# EAGLE board arduino_uno_pcb _with_lcd (EAGLE 6.1)
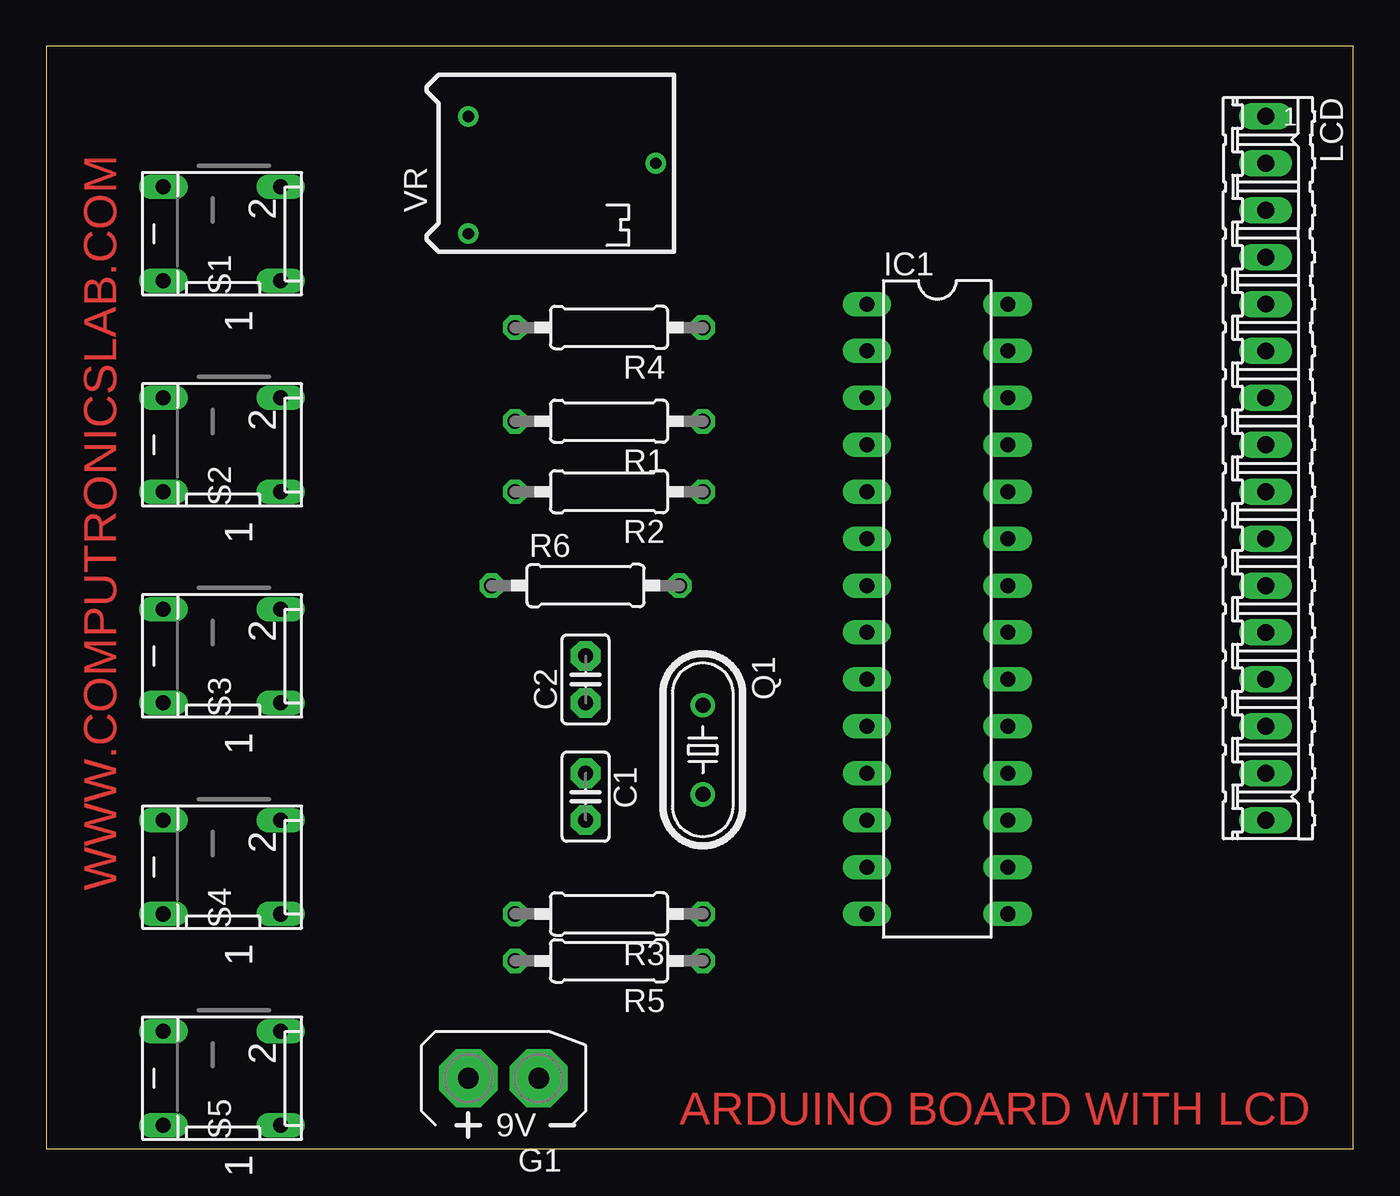
[diagram p0: board, top side]
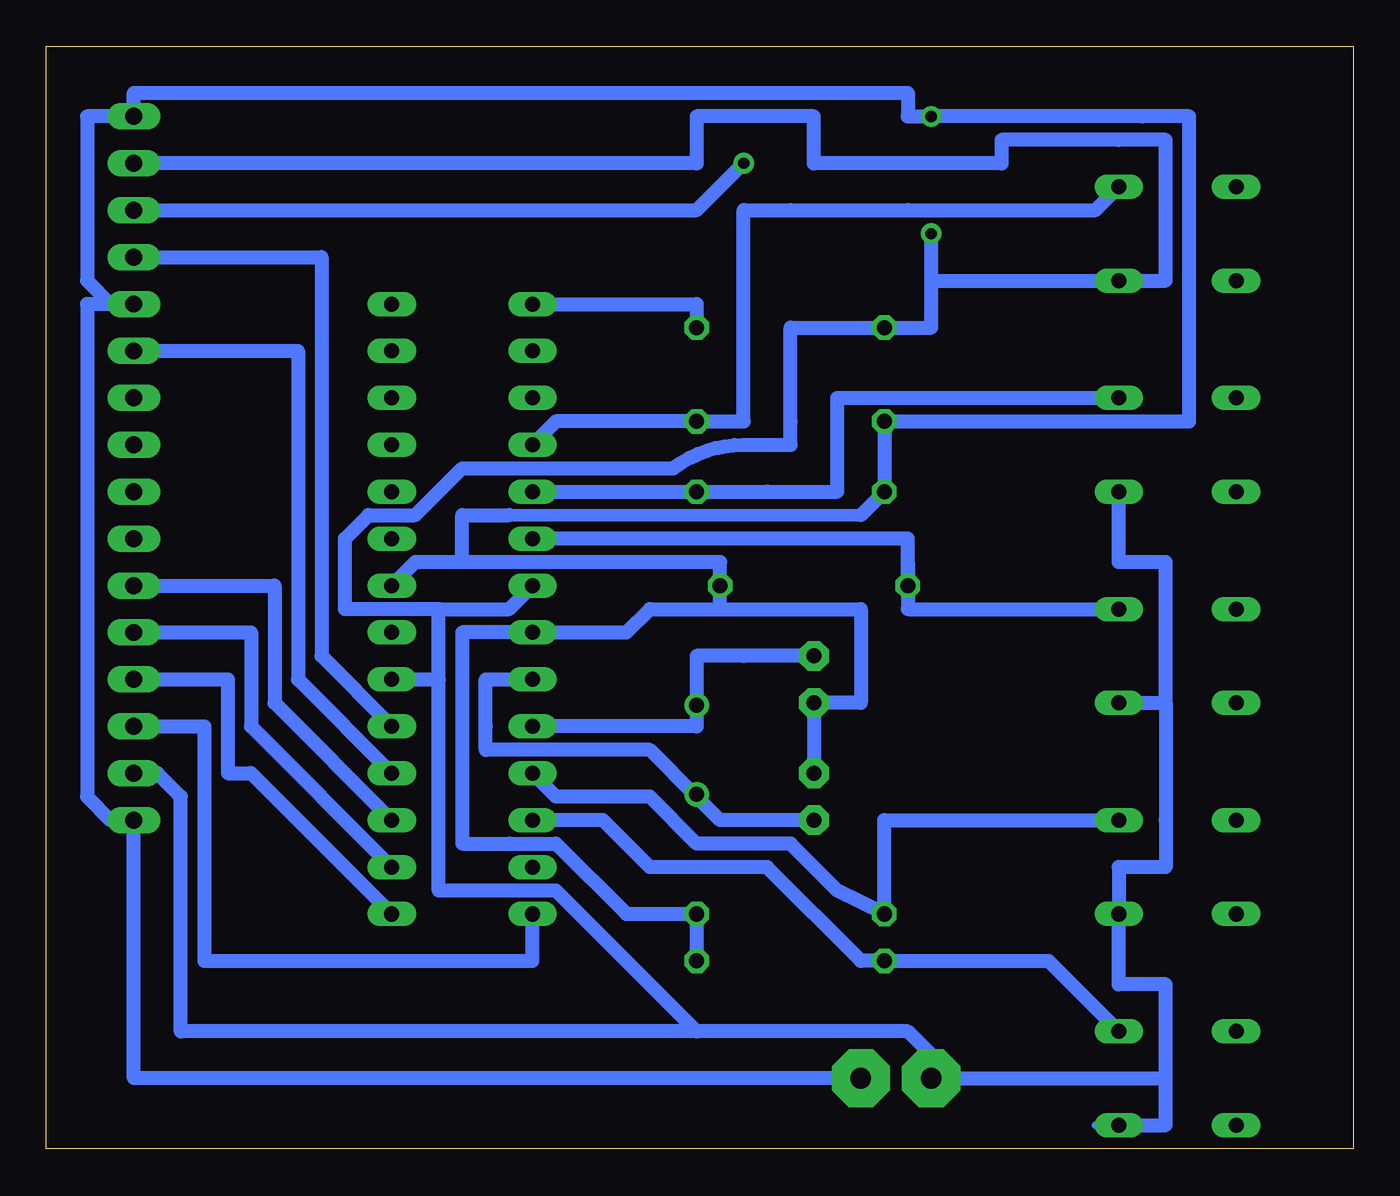
[diagram p1: board, bottom side, seen from below]

Size 70.79 x 59.68 mm. Coordinates in mm from the lower left corner, seen from the top.
Outline: 0,0 70.79,0 70.79,59.68 0,59.68 0,0
Copper layers (1*16): Top 0.04mm / dielectric 1.5mm / Bottom 0.04mm
Design rules: minimum track width 30mil, minimum drill 35mil, track to track 8mil, track to pad 8mil, pad to pad 8mil, via to via 8mil, smd to smd 8mil, copper to edge 50mil, drill to drill 8mil, minimum pad ring 10mil, minimum via ring 8mil, stop-mask expansion 4mil, vias tented up to drill 0mil, thermal gap 10mil

## Footprints (pad centres in the part's own frame; a part is rotated, then mirrored left to right if it is on the bottom)
C2.5-2 = drill 0.813 pad 1.6 octagon: 1 -1.27,0; 2 1.27,0
AB9V = drill 1.118 pad 3.15 octagon: + 0,2.54; - 0,-1.27
DIL28-3 = drill 0.813 long: 1 -16.51,-3.81; 2 -13.97,-3.81; 3 -11.43,-3.81; 4 -8.89,-3.81; 5 -6.35,-3.81; 6 -3.81,-3.81; 7 -1.27,-3.81; 8 1.27,-3.81; 9 3.81,-3.81; 10 6.35,-3.81; 11 8.89,-3.81; 12 11.43,-3.81; 13 13.97,-3.81; 14 16.51,-3.81; 15 16.51,3.81; 16 13.97,3.81; 17 11.43,3.81; 18 8.89,3.81; 19 6.35,3.81; 20 3.81,3.81; 21 1.27,3.81; 22 -1.27,3.81; 23 -3.81,3.81; 24 -6.35,3.81; 25 -8.89,3.81; 26 -11.43,3.81; 27 -13.97,3.81; 28 -16.51,3.81
16P = drill 0.914 long: 1 -19.05,0; 2 -16.51,0; 3 -13.97,0; 4 -11.43,0; 5 -8.89,0; 6 -6.35,0; 7 -3.81,0; 8 -1.27,0; 9 1.27,0; 10 3.81,0; 11 6.35,0; 12 8.89,0; 13 11.43,0; 14 13.97,0; 15 16.51,0; 16 19.05,0
HC49/S = drill 0.813: 1 -2.413,0; 2 2.413,0
0207/10 = drill 0.813 octagon: 1 -5.08,0; 2 5.08,0
DP-02 = drill 0.813 long: 1 -2.54,-2.54; 2 2.54,-2.54; 3 2.54,3.81; 4 -2.54,3.81
RTRIM64P = drill 0.61: 1 -2.54,-3.81; 2 7.62,0; 3 -2.54,2.54

## Placement (x,y rotation side)
C1  22pf  [C2.5-2]  29.21,19.05 270 top
C2  22pf  [C2.5-2]  29.21,25.4 90 top
G1  AB9V  [AB9V]  25.4,3.81 90 top
IC1  ATMEGA328  [DIL28-3]  48.26,29.21 270 top
LCD  [16P]  66.04,36.83 270 top
Q1  16MHZ  [HC49/S]  35.56,21.59 270 top
R1  10K  [0207/10]  30.48,39.37 180 top
R2  10K  [0207/10]  30.48,35.56 180 top
R3  10K  [0207/10]  30.48,12.7 180 top
R4  10K  [0207/10]  30.48,44.45 180 top
R5  10K  [0207/10]  30.48,10.16 180 top
R6  10K  [0207/10]  29.21,30.48 0 top
S1  [DP-02]  10.16,49.53 90 top
S2  [DP-02]  10.16,38.1 90 top
S3  [DP-02]  10.16,26.67 90 top
S4  [DP-02]  10.16,15.24 90 top
S5  [DP-02]  10.16,3.81 90 top
VR  100k  [RTRIM64P]  25.4,53.34 0 top

## Library data of the parts
C1 C2 = capacitor-wima
G1 = battery
IC1 = quantum-research-group; OC_FARNELL: unknown; OC_NEWARK: unknown
LCD = con-amp-quick; OC_FARNELL: unknown; OC_NEWARK: unknown
Q1 = crystal; OC_FARNELL: 1667008; OC_NEWARK: unknown
R1-R6 = rcl
S1-S5 = switch-dil; MPN: MCDP02; OC_FARNELL: 1255233; OC_NEWARK: 26M1095
VR = resistor

## Nets
N$1: C1.2 IC1.9 Q1.2
N$2: C2.2 IC1.10 Q1.1
N$3: G1.+ IC1.7 IC1.20 LCD.2 LCD.15 R4.2 S1.1 S2.1 S3.1 S4.1 S5.1 VR.1
N$4: IC1.11 R3.2 S4.2
N$5: IC1.4 R1.1 S1.2
N$6: C1.1 C2.1 G1.- IC1.8 IC1.22 LCD.1 LCD.5 LCD.16 R1.2 R2.2 R3.1 R5.1 R6.2 VR.3
N$7: IC1.5 R2.1 S2.2
N$8: IC1.6 R6.1 S3.2
N$9: IC1.12 R5.2 S5.2
N$22: LCD.3 VR.2
N$23: IC1.19 LCD.4
N$24: IC1.18 LCD.6
N$25: IC1.17 LCD.11
N$26: IC1.16 LCD.12
N$27: IC1.15 LCD.13
N$29: IC1.14 LCD.14
N$31: IC1.1 R4.1

## Tracks (layer width: path | path; a pad name or v marks a point on that pad's centre or on a via)
N$1
  Bottom 0.762: 35.56,19.05 34.29,17.78 C1.2 | 35.56,19.05 Q1.2 35.56,19.05 | IC1.9 46.99,25.4 46.99,22.86 46.99,21.59 38.1,21.59 35.56,19.05
N$2
  Bottom 0.762: 35.56,24.13 35.56,26.67 33.02,26.67 C2.2 | 35.56,24.13 Q1.1 35.56,24.13 | IC1.10 35.56,22.86 35.56,24.13
N$3
  Bottom 0.406: 10.16,5.08 10.16,3.81 10.16,1.27 S5.1 13.97,1.27
  Bottom 0.762: 22.86,46.99 22.86,44.45 R4.2 30.48,44.45 30.48,39.37 30.48,38.1 33.02,38.1 arc-37 36.83,36.83 39.37,36.83 48.26,36.83 50.8,34.29 53.34,34.29 54.61,33.02 54.61,29.21 49.53,29.21 | 22.86,46.99 VR.1 | 22.86,46.99 S1.1 10.16,46.99 10.16,52.07 10.16,54.61 12.7,54.61 19.05,54.61 19.05,53.34 29.21,53.34 29.21,55.88 35.56,55.88 35.56,54.61 35.56,53.34 LCD.2 | 10.16,24.13 10.16,17.78 10.16,15.24 12.7,15.24 S4.1 12.7,8.89 10.16,8.89 10.16,6.35 10.16,5.08 10.16,3.81 | S3.1 10.16,24.13 | S2.1 12.7,31.75 10.16,31.75 10.16,29.21 10.16,24.13 | IC1.7 45.72,29.21 49.53,29.21 | 49.53,25.4 49.53,29.21 | IC1.20 49.53,25.4 | LCD.15 64.77,20.32 63.5,19.05 63.5,6.35 35.56,6.35 | 35.56,6.35 24.13,6.35 22.86,5.08 | G1.+ 22.86,5.08 | 49.53,25.4 49.53,13.97 43.18,13.97 35.56,6.35 | 22.86,5.08 G1.+ | G1.+ 10.16,3.81 | S5.1 10.16,1.27 10.16,3.81
N$4
  Bottom 0.762: S4.2 25.4,17.78 R3.2 27.94,13.97 30.48,16.51 35.56,16.51 38.1,19.05 43.18,19.05 IC1.11
N$5
  Bottom 0.762: IC1.4 43.18,39.37 R1.1 33.02,39.37 33.02,50.8 30.48,50.8 24.13,50.8 13.97,50.8 S1.2
N$6
  Bottom 0.686: 45.72,34.29 26.67,34.29
  Bottom 0.762: G1.- 66.04,3.81 LCD.16 67.31,17.78 68.58,19.05 68.58,45.72 67.31,45.72 | 67.31,45.72 LCD.5 67.31,45.72 | 67.31,45.72 68.58,46.99 68.58,55.88 LCD.1 66.04,57.15 24.13,57.15 24.13,55.88 VR.3 11.43,55.88 8.89,55.88 8.89,53.34 8.89,39.37 R1.2 R2.2 26.67,34.29 | C1.1 C2.1 26.67,24.13 26.67,29.21 34.29,29.21 | R5.1 R3.1 39.37,12.7 43.18,16.51 45.72,16.51 48.26,16.51 48.26,19.05 48.26,27.94 IC1.8 39.37,27.94 38.1,29.21 34.29,29.21 | 34.29,29.21 R6.2 34.29,31.75 48.26,31.75 | IC1.22 50.8,31.75 48.26,31.75 | 48.26,31.75 48.26,34.29 45.72,34.29
N$7
  Bottom 0.762: IC1.5 R2.1 31.75,35.56 27.94,35.56 27.94,40.64 26.67,40.64 S2.2
N$8
  Bottom 0.762: S3.2 24.13,29.21 24.13,31.75 R6.1 24.13,33.02 26.67,33.02 IC1.6
N$9
  Bottom 0.762: S5.2 16.51,10.16 R5.2 26.67,10.16 31.75,15.24 38.1,15.24 40.64,17.78 IC1.12
N$22
  Bottom 0.762: VR.2 35.56,50.8 LCD.3
N$23
  Bottom 0.762: IC1.19 55.88,26.67 55.88,48.26 LCD.4
N$24
  Bottom 0.762: IC1.18 57.15,25.4 57.15,43.18 LCD.6
N$25
  Bottom 0.762: IC1.17 58.42,24.13 58.42,30.48 LCD.11
N$26
  Bottom 0.762: IC1.16 59.69,22.86 59.69,27.94 LCD.12
N$27
  Bottom 0.762: IC1.15 59.69,20.32 60.96,20.32 60.96,25.4 LCD.13
N$29
  Bottom 0.762: IC1.14 44.45,10.16 62.23,10.16 62.23,19.05 62.23,22.86 LCD.14
N$31
  Bottom 0.762: R4.1 35.56,45.72 IC1.1

## Text on the board
Top: WWW.COMPUTRONICSLAB.COM | ARDUINO BOARD WITH LCD